# Altium PCB Multivibrator.PcbDoc
Units mm, origin at the board's own origin, x right, y up, seen from the top; angles counter-clockwise.
Board outline 20 x 20 mm, 2 copper layers (Top Layer, Bottom Layer); 9 components, 6 nets, 20 pads, 0 vias.
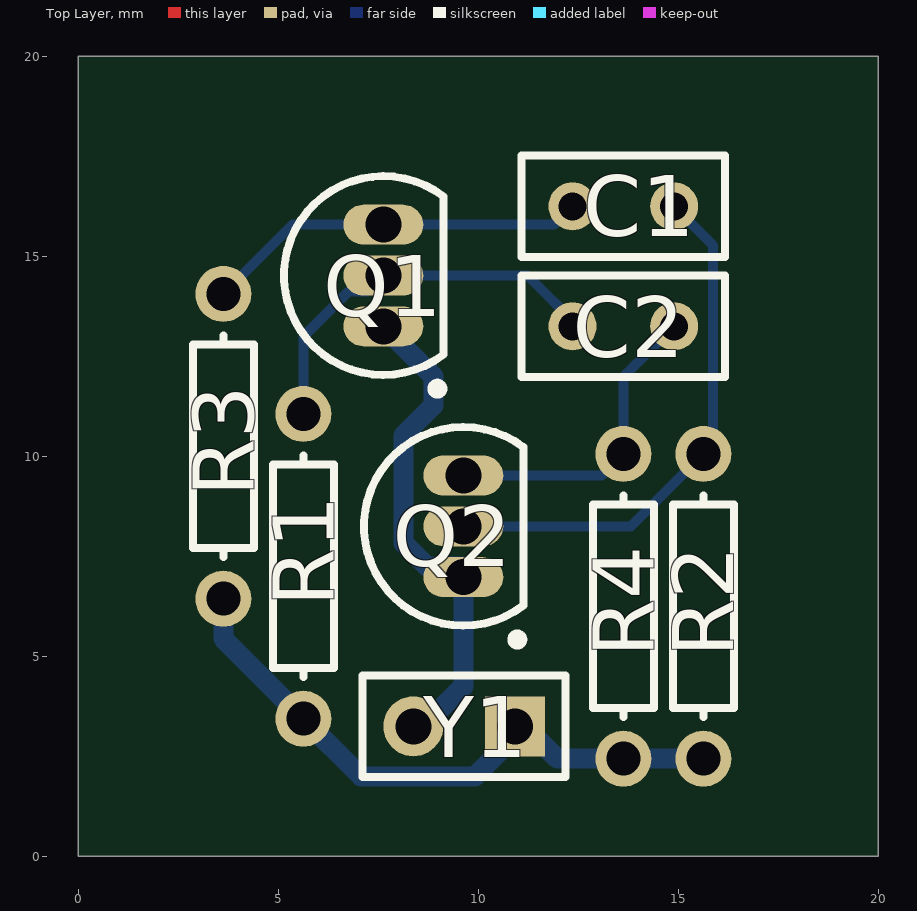
[diagram p0: Top Layer view]
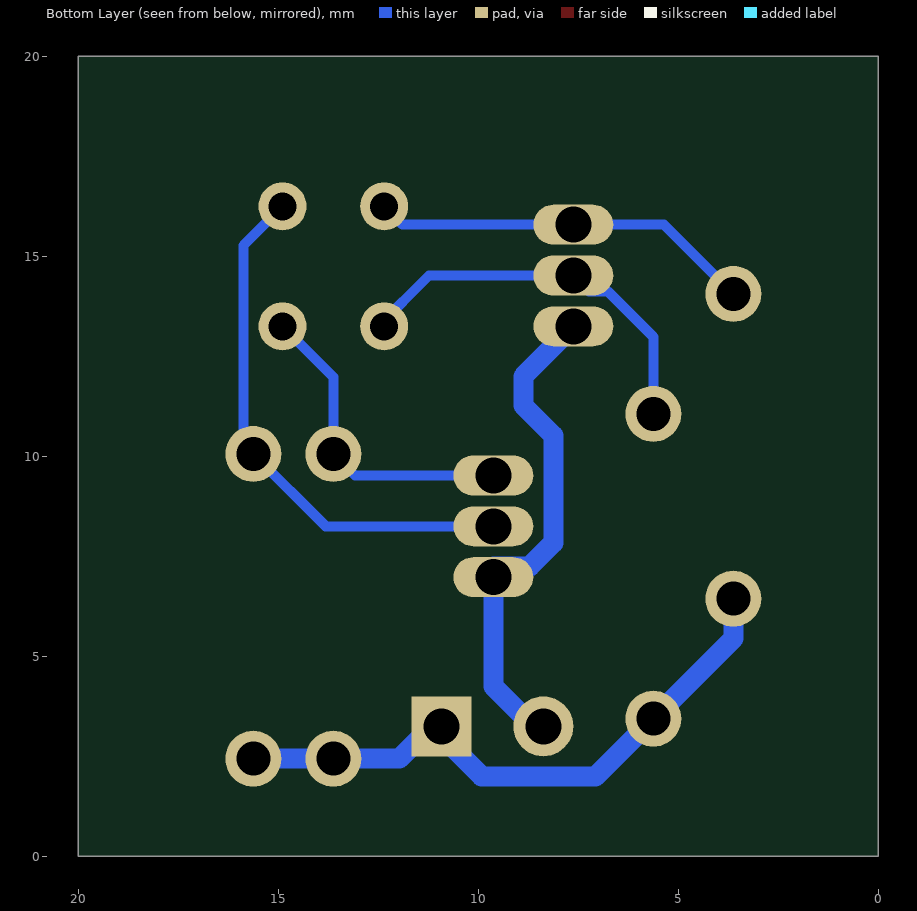
[diagram p1: Bottom Layer view, seen from below]

## Layer stack, top to bottom
Top Solder: solder mask 0.0102, Solder Resist, Dk 3.5
Top Layer: signal copper 0.0356
Dielectric1: dielectric 0.32, FR-4, Dk 4.8
Bottom Layer: signal copper 0.0356
Bottom Solder: solder mask 0.0102, Solder Resist, Dk 3.5

## Board outline
0,0 0,20 20,20 20,0

## Design rules (kind name [scope] priority, off if disabled: settings)
Clearance [All] p1: gap=0.25
FabricationTestPointUsage TestPointUsage [All] p1: valid=0 allowmultiple=FALSE
FabricationTestpoint Testpoint [All] p1: side=3 testpointundercomponent=TRUE minsize=1.016 maxsize=2.54 preferedsize=1.524 minholesize=0 maxholesize=1.016 preferedholesize=0.813 testpointgrid=0.025 allowsidetop=TRUE allowsidebottom=TRUE usegrid=TRUE gridtolerance=0
PolygonConnect [All] p1: connectstyle=Relief reliefconductorwidth=0.254 reliefentries=4 polygonreliefangle="90 Angle" airgapwidth=0.254
RoutingVias [All] p1: holewidth=0.6 width=1 viastyle="Through Hole" minholewidth=0.6 minwidth=1 maxholewidth=0.6 maxwidth=1
SilkToSolderMaskClearance SilkscreenOverComponentPads [IsPad] p1: minsilkscreentomaskgap=0.254 clearancetoexposedcopper=TRUE
SolderMaskExpansion [All] p1: expansion=0.102
Width Width_Power [(InNet('12V') OR InNet('GND'))] p1: maxlimit=0.5 minlimit=0.25 preferedwidth=0.5
Width [All] p2: maxlimit=0.25 minlimit=0.25 preferedwidth=0.25 minimp=50.000000 maximp=50.000000 favimp=50.000000
27 further rules are at their usual default settings.

## Components (designator, comment, footprint, x,y, rotation, side; value= is the part's Value field where it differs from the comment)
C1 "20nF" RAD-0.1 13.625,16.25 r0 top
C2 "20nF" RAD-0.1 13.625,13.25 r0 top
Q1 "2N3904" TO-92A 7.625,14.52 r0 top
Q2 "2N3904" TO-92A 9.625,8.25 r0 top
R1 "100k" AXIAL-0.3 5.625,7.25 r270 top
R2 "100K" AXIAL-0.3 15.625,6.25 r90 top
R3 "1K" AXIAL-0.3 3.625,10.25 r90 top
R4 "1K" AXIAL-0.3 13.625,6.25 r90 top
Y1 "Header 2" HDR1X2 10.915,3.25 r180 top

## Footprints (in the part's own frame and the unit in brackets; to place one, negate y for a bottom-side part, rotate by r counter-clockwise, add the part's x,y. Pads: shape width x height; smd on the part's side, far side on the other; paste and mask are expansions set on the pad)
AXIAL-0.3 [mm] "Axial Device, Thru-Hole; 2 Leads; 0.3 in Pin Spacing"
  round 1.4 hole 0.85: 1(-3.81,0) 2(3.81,0)
  silkscreen extent -2.77,-0.76 2.77,0.76
HDR1X2 [mm] "Connector; Header; 2 Position"
  rect 1.5x1.5 hole 0.9: 1(0,0)
  round 1.5 hole 0.9: 2(2.54,0)
  silkscreen extent -1.27,-1.27 3.81,1.27
RAD-0.1 [mm] "Radial Cap, Thru-Hole; 2 Leads; 0.1 in Pin Spacing"
  round 1.2 hole 0.7: 1(-1.27,0) 2(1.27,0)
  silkscreen extent -2.54,-1.27 2.54,1.27
TO-92A [mm] "TO, Flat Index; 3 In-Line, Axial Leads; Body Dia. 4.5mm; Leads 0.51 x 0.48 mm (max)"
  oval 2x1 hole 0.9: 1(0,-1.27) 2(0,0) 3(0,1.27)
  silkscreen extent -2.48,-2.95 1.5,2.48, body extent -2.48,-2.5 1.5,2.5, height 6.86

## Part data
C1 C2: library part Cap, "Capacitor"
Q1 Q2: "NPN General Purpose Amplifier"
R1 R2 R3 R4: library part Res1, "Resistor"
Y1: "Header, 2-Pin"

## Nets (pads, with @x,y where several pads share a name; then routed paths per layer and width w, separated by ;. In a path a pad name is that pad's centre, name@x,y a point inside that pad or via, vN(x,y) a via of type N, cw(c..) or ccw(c..) an arc to the next point about the centre after c; other vN are vias at no path point)
12V: R1.2 R2.1 R3.1 R4.1 Y1.1 | length 15.3
  Bottom Layer w0.5: R3.1 3.625,5.44 R1.2 7.065,2 9.915,2 11.165,3.25 11.975,2.44 R4.1 R2.1
GND: Q1.1 Q2.1 Y1.2 | length 12.4
  Bottom Layer w0.5: Q1.1 8.875,12 8.875,11.27 8.125,10.52 8.125,7.836 8.711,7.25 9.625,7.25 Q2.1 9.625,4.25 Y1.2@8.625,3.25
NetC1_1: C1.1 Q1.3 R3.2 | length 9.6
  Bottom Layer w0.25: R3.2 5.355,15.79 Q1.3 11.895,15.79 C1.1
NetC1_2: C1.2 Q2.2 R2.2 | length 13.4
  Bottom Layer w0.25: Q2.2 13.815,8.25 R2.2 15.87,10.305 15.87,15.275 C1.2
NetC2_1: C2.1 Q1.2 R1.1 | length 10
  Bottom Layer w0.25: R1.1 5.625,12.987 6.763,14.125 7.23,14.125 Q1.2 11.23,14.52 C2.1@12.5,13.25
NetC2_2: C2.2 Q2.3 R4.2 | length 7.9
  Bottom Layer w0.25: Q2.3 13.085,9.52 R4.2 13.625,11.98 C2.2

## Silkscreen, mask and mechanical layers (free items; w line width, h text height)
Mechanical 16:
  drawing of 1874 lines, arcs and shapes, not listed
  text "1" at -84.286,115.509 h1.78
  text "2" at -11.642,115.509 h1.78
  text "3" at 61.51,115.509 h1.78
  text "4" at 134.408,115.509 h1.78
  text "A" at -118.627,92.497 h1.78
  text "A" at 168.393,92.497 h1.78
  text "B" at -118.627,44.44 h1.78
  text "B" at 168.393,44.44 h1.78
  text "C" at -118.627,-4.074 h1.78
  text "C" at 168.393,-4.074 h1.78
  text "ENGINEER:" at 53.458,-41.082 h1.14
  text "TITLE:" at 91.558,-41.082 h1.14
  text "PCB DESIGNER:" at 53.458,-48.575 h1.14
  text "D" at -118.627,-52.08 h1.78
  text "D" at 168.393,-52.08 h1.78
  text "DATE:" at 53.458,-56.322 h1.14
  text "PART NO.:" at 91.558,-56.322 h1.14
  text "REV:" at 144.898,-56.322 h1.14
  text "Altium Limited" at 20.438,-58.862 h1.78
  text ".PRINT_DATE" at 54.728,-59.37 h1.78
  text "12a Rodborough Rd" at 20.438,-61.402 h1.78
  text "Frenchs Forest" at 20.438,-63.942 h1.78
  text "FILE NAME:" at 53.458,-63.942 h1.14
  text "DWG NO:" at 91.558,-63.942 h1.14
  text "SCALE:" at 144.898,-63.942 h1.14
  text "NSW 2086" at 20.438,-66.482 h1.78
  text ".PCB_FILE_NAME_NO_PATH" at 54.728,-66.99 h1.78
  text "1" at -84.286,-72.451 h1.78
  text "2" at -11.642,-72.451 h1.78
  text "3" at 61.51,-72.451 h1.78
  text "4" at 134.408,-72.451 h1.78